# Altium PCB PhantomPowerSupply_Board.PcbDoc
Units mm, origin at the board's own origin, x right, y up, seen from the top; angles counter-clockwise.
Board outline 80 x 60 mm, 2 copper layers (Top Layer, Bottom Layer); 41 components, 26 nets, 92 pads, 0 vias.
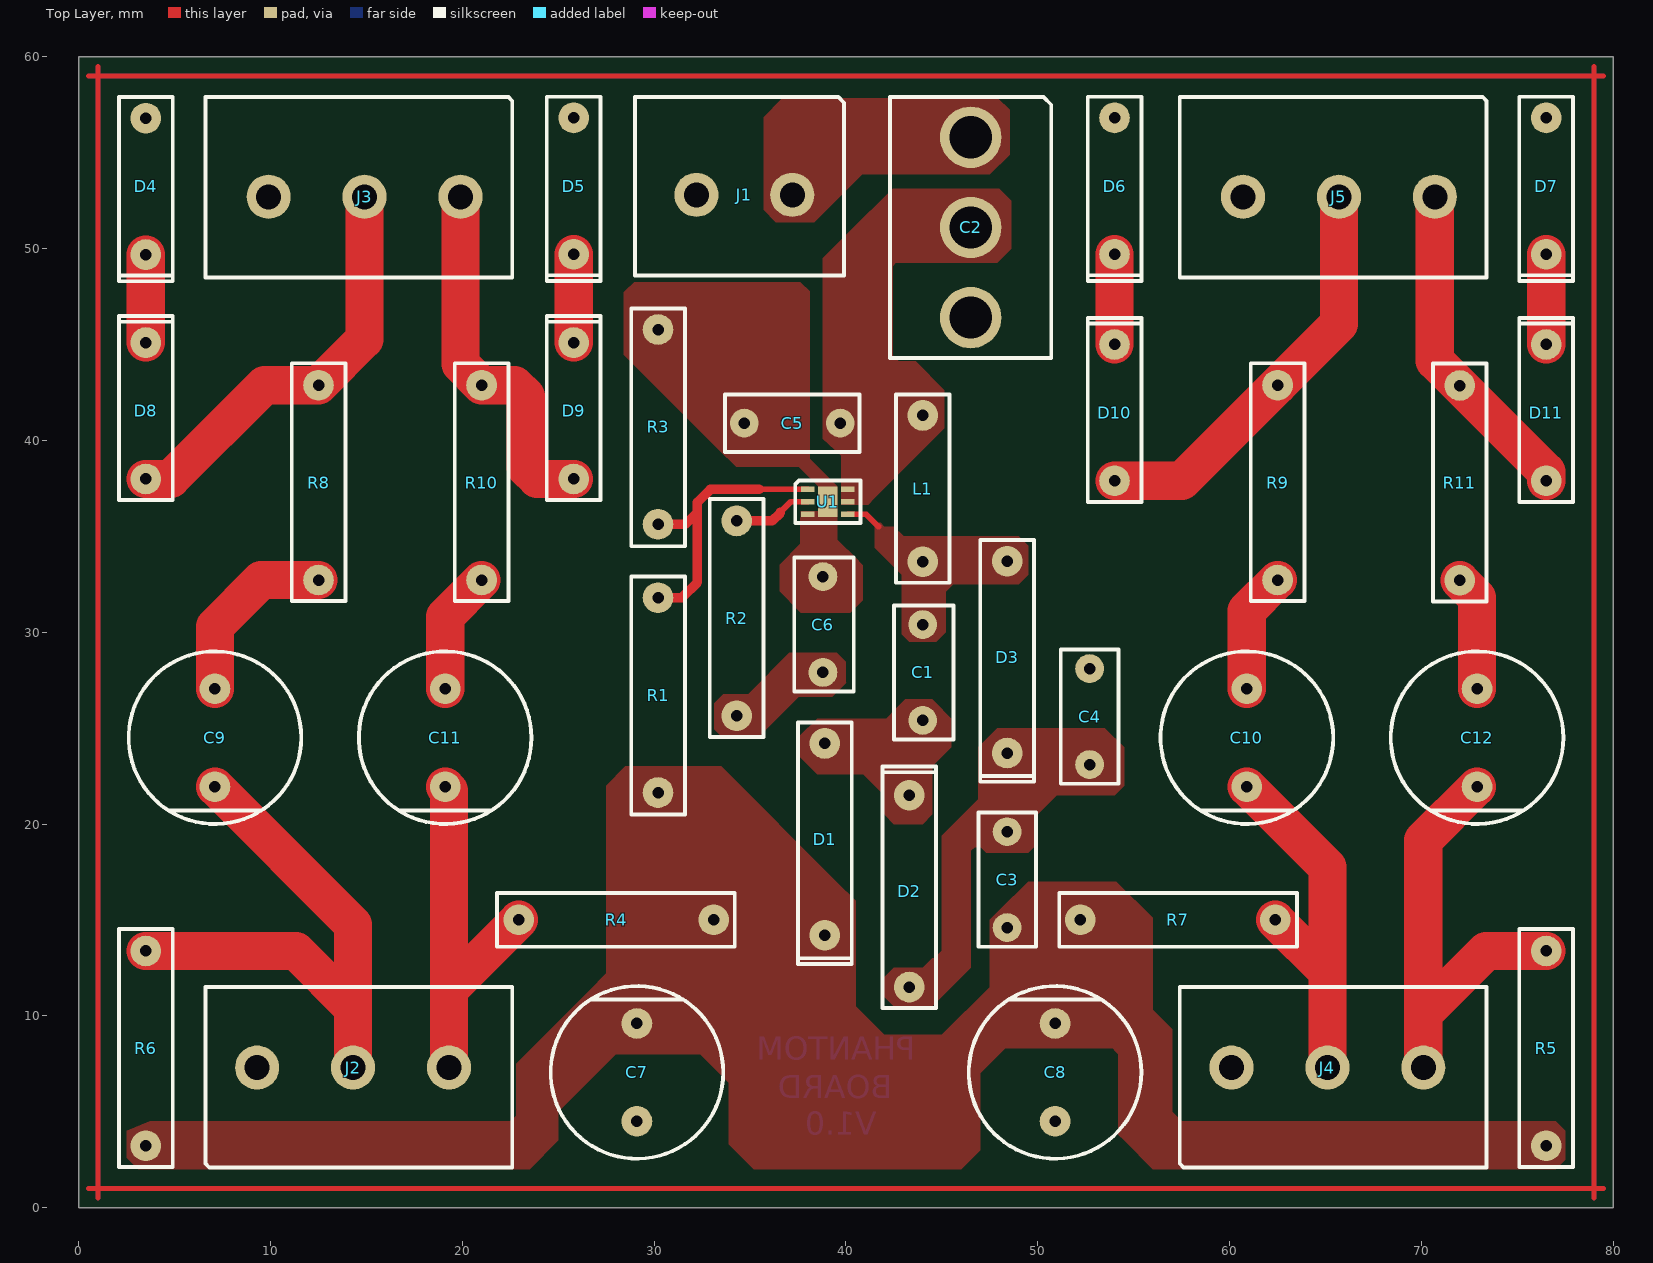
[diagram p0: Top Layer view]
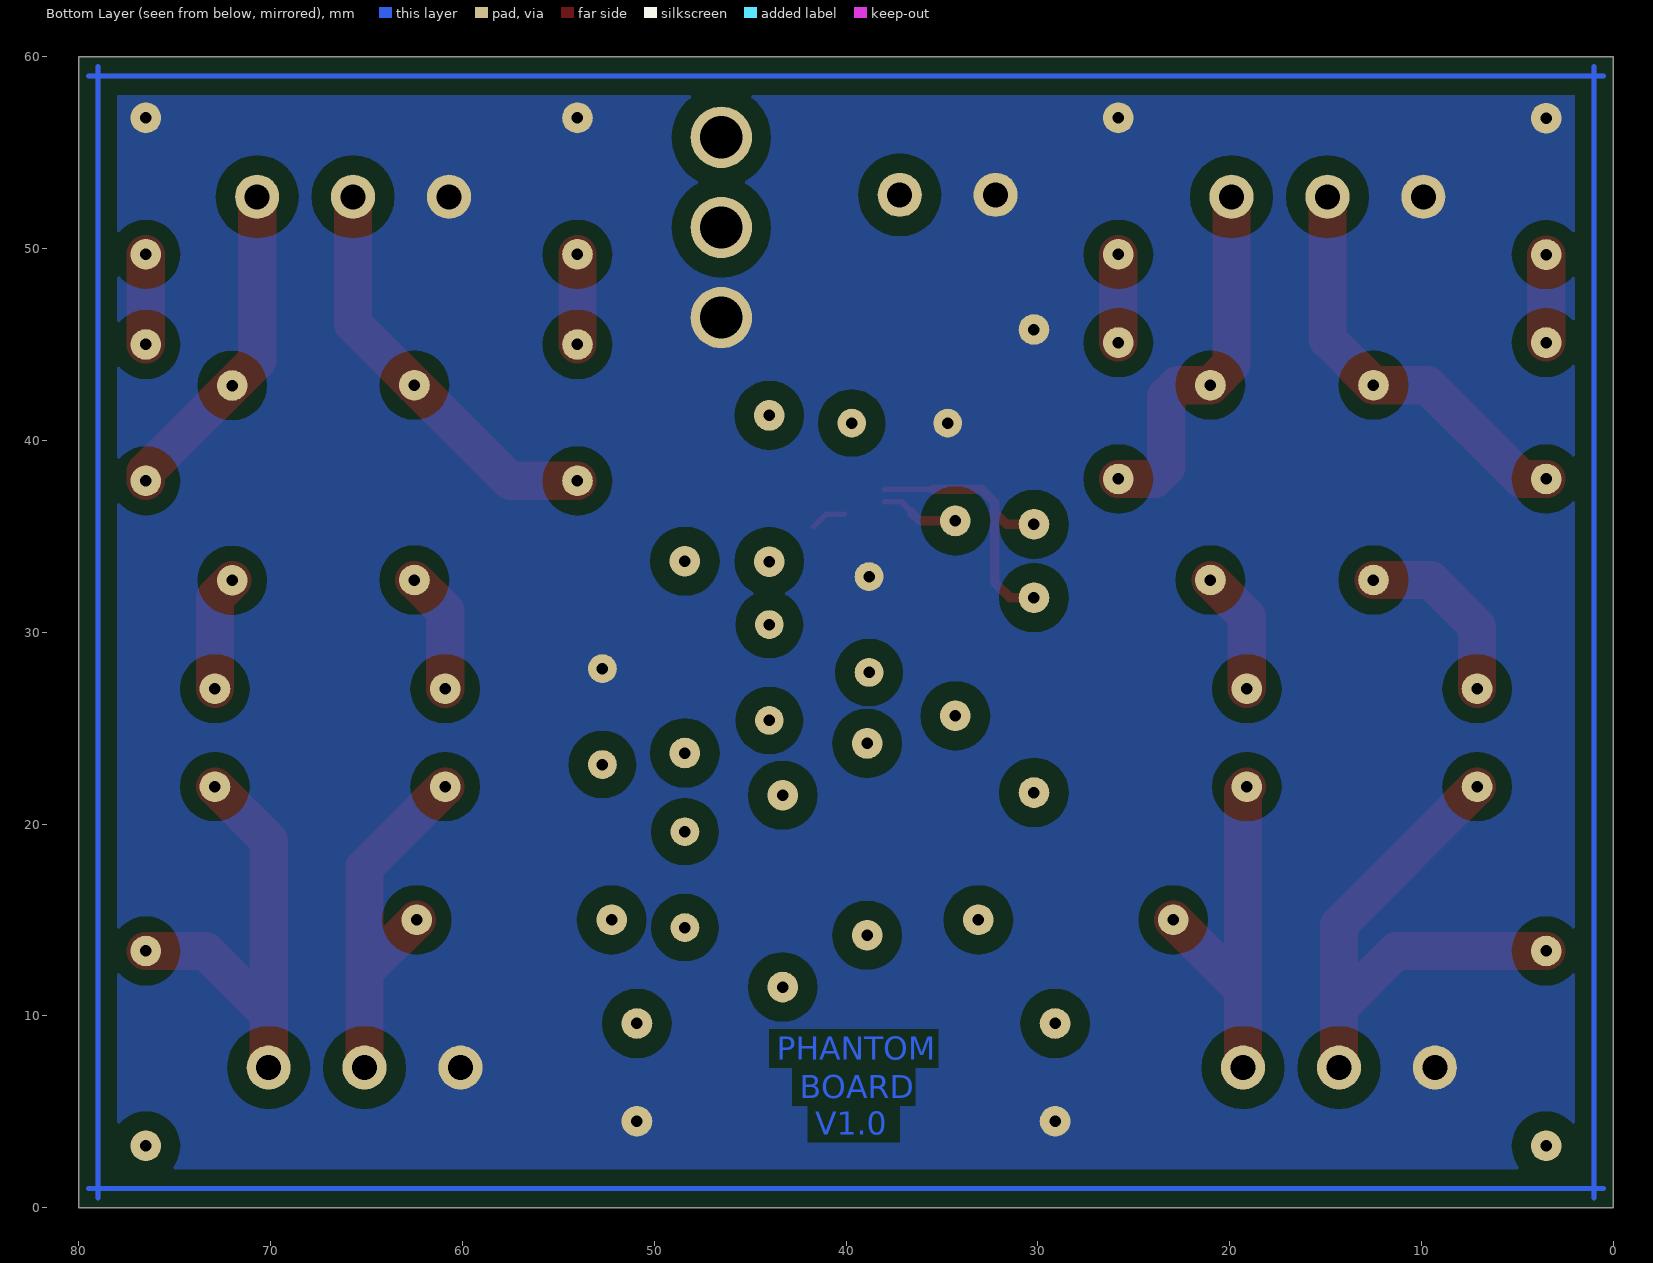
[diagram p1: Bottom Layer view, seen from below]
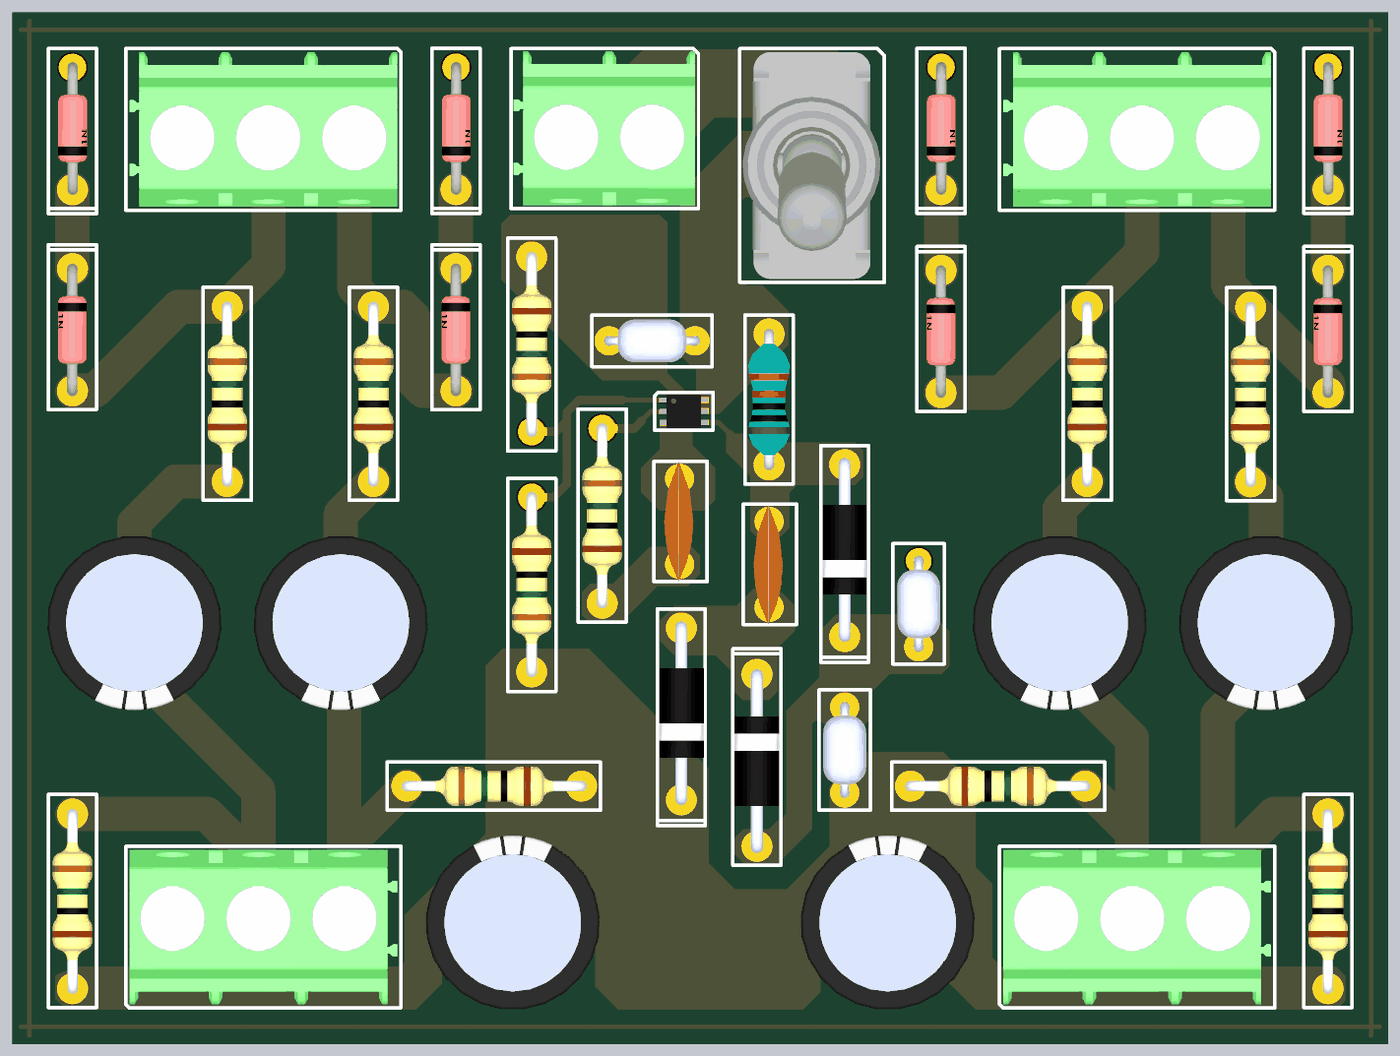
[diagram p2: 3D render of the assembled board from above, using the file's embedded part models]

## Layer stack, top to bottom
Top Solder: solder mask 0.0102, Solder Resist, Dk 3.5
Top Layer: signal copper 0.0356
Dielectric 1: dielectric 0.32, FR-4, Dk 4.8
Bottom Layer: signal copper 0.0356
Bottom Solder: solder mask 0.0102, Solder Resist, Dk 3.5

## Board outline
0,0 0,60 80,60 80,0 0,0

## Design rules (kind name [scope] priority, off if disabled: settings)
Clearance AGND_POLYGON [(OnLayer('Bottom Layer') AND InPoly) vs IsPad] p1: gap=1
Clearance [All] p2: gap=0.1
ComponentClearance [All] p1: gap=0.1 collisioncheckmode=3 verticalgap=0.1 showdistances=FALSE
Height [All] p1: minheight=0 maxheight=100 prefheight=12.7
MinimumSolderMaskSliver [All] p1: minsoldermaskwidth=0.1
PlaneClearance [All] p1: clearance=1
PlaneConnect [All] p1: planeconnectstyle=Direct reliefexpansion=0.508 reliefentries=4 reliefconductorwidth=0.254 reliefairgap=0.254
PolygonConnect [All] p1: connectstyle=Direct reliefconductorwidth=0.254 reliefentries=4 polygonreliefangle="90 Angle" airgapwidth=0.254
RoutingVias [All] p1: holewidth=0.711 width=1.27 viastyle="Through Hole" minholewidth=0.711 minwidth=1.27 maxholewidth=0.711 maxwidth=1.27
SilkToSolderMaskClearance [IsPad] p1: minsilkscreentomaskgap=0.1 clearancetoexposedcopper=TRUE
SolderMaskExpansion [All] p1: expansion=0.102
UnpouredPolygon [All] p1: allowunpoured=FALSE
Width [All] p1: maxlimit=5 minlimit=0.05 preferedwidth=0.2
23 further rules are at their usual default settings.

## Components (designator, comment, footprint, x,y, rotation, side; value= is the part's Value field where it differs from the comment)
C1 "1 uF" CRADIAL-CERAMIC-BROWN 44,27.9 r270 top
C2 "100SP1T1B1M2QEH" SPDT-M2 46.5,51.1 r270 top
C3 "4.7 uF" CRADIAL-CERAMIC 48.4,17.1 r270 top
C4 "4.7 uF" CRADIAL-CERAMIC 52.7,25.6 r270 top
C5 "4.7 uF" CRADIAL-CERAMIC 37.2,40.9 r0 top
C6 "10 nF" CRADIAL-CERAMIC-BROWN 38.8,30.4 r270 top
C7 "10uF" C-ELECTROLYTIC-RADIAL 29.1,7.05 r270 top
C8 "10uF" C-ELECTROLYTIC-RADIAL 50.9,7.05 r270 top
C9 "22uF 63 V" C-ELECTROLYTIC-RADIAL 7.1,24.5 r90 top
C10 "22uF 63 V" C-ELECTROLYTIC-RADIAL 60.9,24.5 r90 top
C11 "22uF 63 V" C-ELECTROLYTIC-RADIAL 19.1,24.5 r90 top
C12 "22uF 63 V" C-ELECTROLYTIC-RADIAL 72.9,24.5 r90 top
D1 "SB140-E3/54" D-SCHOTTKY-AXIAL 38.9,19.2 r270 top
D2 "SB140-E3/54" D-SCHOTTKY-AXIAL 43.3,16.5 r90 top
D3 "SB140-E3/54" D-SCHOTTKY-AXIAL 48.4,28.7 r270 top
D4 "ZPY10-TR" D-ZENER-AXIAL 3.5,56.8 r270 top
D5 "ZPY10-TR" D-ZENER-AXIAL 25.8,56.812 r270 top
D6 "ZPY10-TR" D-ZENER-AXIAL 54,56.812 r270 top
D7 "ZPY10-TR" D-ZENER-AXIAL 76.5,56.812 r270 top
D8 "ZPY10-TR" D-ZENER-AXIAL 3.5,37.988 r90 top
D9 "ZPY10-TR" D-ZENER-AXIAL 25.8,37.988 r90 top
D10 "ZPY10-TR" D-ZENER-AXIAL 54,37.888 r90 top
D11 "ZPY10-TR" D-ZENER-AXIAL 76.5,37.888 r90 top
J1 "BC-500X10-2BK" SCREW-CON-2POS 34.7,52.8 r180 top
J2 "BC-500X10-3GN" SCREW-CON-3POS 14.3,7.3 r0 top
J3 "BC-500X10-3GN" SCREW-CON-3POS 14.9,52.7 r180 top
J4 "BC-500X10-3GN" SCREW-CON-3POS 65.1,7.3 r0 top
J5 "BC-500X10-3GN" SCREW-CON-3POS 65.7,52.7 r180 top
L1 "22uH" L-AXIAL 44,41.3 r270 top
R1 "383k" R-AXIAL 30.2,26.72 r270 top
R2 "10k" R-AXIAL 34.3,30.72 r90 top
R3 "10k" R-AXIAL 30.2,40.7 r270 top
R4 "6.81k 0.1%" R-AXIAL 28.02,15 r180 top
R5 "6.81k 0.1%" R-AXIAL 76.5,8.3 r90 top
R6 "6.81k 0.1%" R-AXIAL 3.5,8.3 r90 top
R7 "6.81k 0.1%" R-AXIAL 57.3,15 r0 top
R8 "10" R-AXIAL 12.5,37.8 r90 top
R9 "10" R-AXIAL 62.5,37.8 r90 top
R10 "10" R-AXIAL 21,37.8 r90 top
R11 "10" R-AXIAL 72,37.78 r90 top
U1 "TPS61170DRVR" S-PWSON-N6 39.05,36.8 r0 top

## Footprints (in the part's own frame and the unit in brackets; to place one, negate y for a bottom-side part, rotate by r counter-clockwise, add the part's x,y. Pads: shape width x height; smd on the part's side, far side on the other; paste and mask are expansions set on the pad)
C-ELECTROLYTIC-RADIAL [mm]
  round 1.6 hole 0.6: 1(-2.55,0) 2(2.55,0)
  silkscreen extent -4.5,-4.5 4.5,4.5, body extent -5.08,-5.06 5.04,5.06, height 12.8
CRADIAL-CERAMIC [mm]
  round 1.5 hole 0.6: 1(-2.5,0) 2(2.5,0)
  silkscreen extent -3.5,-1.5 3.5,1.5, body extent -2.75,-1.25 2.75,1.25, height 6.54
CRADIAL-CERAMIC-BROWN [mm]
  round 1.5 hole 0.6: 1(-2.5,0) 2(2.5,0)
  silkscreen extent -3.5,-1.5 3.5,1.6, body extent -3.5,-0.9 3.5,0.8, height 7.25
D-SCHOTTKY-AXIAL [mm]
  round 1.6 hole 0.6: 1(-5,0) 2(5,0)
  silkscreen extent -6.1,-1.4 6.5,1.4, body extent -5.4,-1.3 5.3,1.3, height 3.3
D-ZENER-AXIAL [mm]
  round 1.6 hole 0.6: 1(0,0) 2(7.112,0)
  silkscreen extent -1.1,-1.4 8.5,1.4, body extent -0.31,-0.83 7.41,0.85, height 2.34
L-AXIAL [mm]
  round 1.6 hole 0.6: 1(0,0) 2(7.62,0)
  silkscreen extent -1.1,-1.4 8.72,1.4, body extent -0.3,-1.21 7.92,1.2, height 2.7
R-AXIAL [mm]
  round 1.6 hole 0.6: 1(-5.08,0) 2(5.08,0)
  silkscreen extent -6.18,-1.4 6.22,1.4, body extent -5.38,-1.16 5.38,1.16, height 2.93
S-PWSON-N6 [mm]
  rect 0.7x0.3 smd mask+0.04: 1(-1.05,0.65) 2(-1.05,0) 3(-1.05,-0.65) 4(1.05,-0.65) 5(1.05,0) 6(1.05,0.65)
  rect 1x1.6 smd mask+0.04: 7(0,0)
  silkscreen extent -1.7,-1.1 1.7,1.1, body extent -1,-1 1,1, height 0.75
SCREW-CON-2POS [mm]
  round 2.3 hole 1.3: 1(-2.5,0) 2(2.5,0)
  silkscreen extent -5.2,-5.1 5.7,4.2, body extent -5.01,-4.95 5.56,4.05, height 11.4
SCREW-CON-3POS [mm]
  round 2.3 hole 1.3: 1(-5,0) 2(0,0) 3(5,0)
  silkscreen extent -7.7,-5.2 8.3,4.2, body extent -7.48,-5 8.09,4, height 11.4
SPDT-M2 [mm]
  round 3.2 hole 2.2: 1(-4.7,0) 2(0,0) 3(4.7,0)
  silkscreen extent -6.8,-4.2 6.8,4.2, body extent -6.6,-4.02 6.6,3.97, height 33.36

## Part data
C1: library part K105K20X7RF5TH5, "Multilayer Ceramic Capacitors MLCC - Leaded 1uF 50volts 10% X7R 5mm LS"
C2: "Toggle Switches SPDT ON-ON PC MNT"
C3 C4 C5: library part FK11X7R1H475K, "Multilayer Ceramic Capacitors MLCC - Leaded 4.7uF 50volts X7R +/-10%"
C6: library part K103K15X7RF5UH5, "Multilayer Ceramic Capacitors MLCC - Leaded .01uF 50volts 10% 5.0mm X7R"
C7 C8: library part REA100M1HBK-0511P, "Aluminium Electrolytic Capacitors - Leaded 50V 10uF 20% 5x11mm"
C9 C10 C11 C12: library part REA220M1JBK-0611P, "Aluminium Electrolytic Capacitors - Leaded 63V 22uF 20% 6.3x11 mm"
D1 D2 D3: "Schottky Diodes & Rectifiers 40 Volt 1.0 Amp 50 Amp IFSM"
D4 D5 D6 D7 D8 D9 D10 D11: "Zener Diodes 10 Volt 1.3 Watt 5%"
J1: library part 5441537, "Fixed Terminal Blocks BC-500X10- 2 BK"
J2 J3 J4 J5: library part 5442183, "Fixed Terminal Blocks BC-500X10- 3 GN 5.00 MM PITCH"
L1: library part 78F220J-RC, "Fixed Inductors 22uH 5%"
R1: library part MF1/4DCT26A3833F, "Metal Film Resistors - Through Hole 1/4 WATT 383K OHM 1%"
R2 R3: library part MF1/4DCT52A1002F, "Metal Film Resistors - Through Hole 1/4 WATT 10K OHM 1%"
R4 R5 R6 R7: library part RN55E6811BRE6, "Metal Film Resistors - Through Hole 1/10watt 6.81Kohms .1% 25ppm"
R8 R9 R10 R11: library part FRM-50JT-52-10R, "Metal Film Resistors - Through Hole 10 OHM 1/2W 5%"
U1: "Voltage Regulators - Switching Regulators 1.2A Sw Hi Vltg Boost Conv"

## Nets (pads, with @x,y where several pads share a name; then routed paths per layer and width w, separated by ;. In a path a pad name is that pad's centre, name@x,y a point inside that pad or via, vN(x,y) a via of type N, cw(c..) or ccw(c..) an arc to the next point about the centre after c; other vN are vias at no path point)
+48V: C3.2 C7.1 C8.1 D1.2 R1.2 R4.1 R5.1 R6.1 R7.1
+VIN: C2.2 C5.2 L1.1 U1.5 U1.6
+VINPUT: C2.1 J1.1
AGND: C2.3 C4.1 C5.1 C6.1 C7.2 C8.2 D4.1 D5.1 D6.1 D7.1 J1.2 J2.1 J3.3 J4.1 J5.3 R3.1 U1.3 U1.7
COMP: R2.2 U1.2 | length 4.1
  Top Layer w0.3: 36.575,36.25 37.125,36.8 U1.2
  Top Layer w0.5: R2.2 36.15,35.8 36.575,36.225 36.575,36.25
FB: R1.1 R3.2 U1.1 | length 14.9
  Top Layer w0.3: 35.462,37.45 U1.1
  Top Layer w0.5: R1.1 31.45,31.8 32.25,32.6 32.25,36.25 ; R3.2 31.62,35.62 32.25,36.25 ; 35.462,37.45 32.925,37.45 32.25,36.775 32.25,36.25
MIC1IN_+: C9.1 J2.2 R6.2 | length 29.7
  Top Layer w2: R6.2 11.32,13.38 14.3,10.4 ; C9.1 14.3,14.75 14.3,10.4 ; J2.2 14.3,10.4
MIC1IN_-: C11.1 J2.3 R4.2 | length 19.9
  Top Layer w2: C11.1 19.3,21.75 19.3,11.4 ; J2.3 19.3,11.4 ; R4.2 19.34,11.4 19.3,11.4
MIC1OUT_+: D8.1 J3.2 R8.2 | length 21.8
  Top Layer w2: D8.1 4.788,37.988 9.68,42.88 R8.2 14.9,45.28 J3.2
MIC1OUT_-: D9.1 J3.1 R10.2 | length 19.3
  Top Layer w2: J3.1 19.9,43.98 R10.2 22.72,42.88 23.3,42.3 23.3,38.6 23.912,37.988 D9.1
MIC2IN_+: C10.1 J4.2 R7.2 | length 20.2
  Top Layer w2: C10.1 65.1,17.75 65.1,12.28 ; R7.2 65.1,12.28 ; J4.2 65.1,12.28
MIC2IN_-: C12.1 J4.3 R5.2 | length 23.6
  Top Layer w2: J4.3 70.1,10.1 ; C12.1 70.1,19.15 70.1,10.1 ; R5.2 73.38,13.38 70.1,10.1
MIC2OUT_+: D10.1 J5.2 R9.2 | length 22
  Top Layer w1: D10.1 D10.1@54.212,38.1
  Top Layer w2: D10.1 57.508,37.888 R9.2 65.7,46.08 J5.2
MIC2OUT_-: D11.1 J5.1 R11.2 | length 17.2
  Top Layer w2: J5.1 70.7,44.16 R11.2 76.5,38.36 D11.1
NetC1_2: C1.2 D1.1 D2.2
NetC3_1: C3.1 C4.2 D2.1 D3.2
NetC6_2: C6.2 R2.1
NetC9_2: C9.2 R8.1 | length 9.7
  Top Layer w2: C9.2 7.1,30.3 9.52,32.72 R8.1
NetC10_2: C10.2 R9.1 | length 6.3
  Top Layer w2: C10.2 60.9,31.12 R9.1
NetC11_2: C11.2 R10.1 | length 6.5
  Top Layer w2: C11.2 19.1,30.82 R10.1
NetC12_2: C12.2 R11.1 | length 6
  Top Layer w2: R11.1 72.9,31.8 C12.2
NetD4_2: D4.2 D8.2 | length 4.6
  Top Layer w2: D8.2 D4.2
NetD5_2: D5.2 D9.2 | length 4.6
  Top Layer w2: D9.2 D5.2
NetD6_2: D6.2 D10.2 | length 4.7
  Top Layer w2: D10.2 D6.2
NetD7_2: D7.2 D11.2 | length 4.7
  Top Layer w2: D11.2 D7.2
SW: C1.1 D3.1 L1.2 U1.4 | length 1.9
  Top Layer w0.3: U1.4 41.05,36.15 41.7,35.5
copper on no net: | length 552.1
  Top Layer w0.254: 0.5,1 1.5,1 78.5,1 79.5,1 ; 0.5,59 1.5,59 78.5,59 79.5,59 ; 1,0.5 1,1.5 1,58.5 1,59.5 ; 79,0.5 79,1.5 ; 79,1.4 79,58.5 79,59.5
  Bottom Layer w0.254: 0.5,1 1.5,1 78.5,1 79.5,1 ; 0.5,59 1.5,59 78.5,59 79.5,59 ; 1,0.5 1,1.5 1,58.5 1,59.5 ; 79,0.5 79,1.5 79,58.5 79,59.5

## Polygon pours and split planes (outlines as drawn)
+48V on Top Layer "+VIN_TOPLAYER_PL" (solid, pour order 26): 27.5,16.2 27.5,22 28.5,23 32,23 33.5,23 39.5,17 39.5,16.5 35.9,12.9 35.5,12.5 30.1,12.5 30.1,13.6
NetC1_2 on Top Layer "+VIN_TOPLAYER_PL" (solid, pour order 25): 45,26 44.5,26.5 43.1,26.5 42.6,26 42.1,25.5 42,25.5 38.5,25.5 37.6,24.6 37.6,23.5 38.5,22.6 40.9,22.6 42,21.5 42,20.5 42.5,20 44,20 44.5,20.5 44.5,22.5 44.5,23 45.5,24 45.5,25.5 45,26 44.8,26.2
+48V on Top Layer "+VIN_TOPLAYER_PL" (solid, pour order 24): 2.5,4 2.5,2.6 3.1,2 23.5,2 25,3.5 25,4.9 25,5 28,8 30.1,8 30.6,8.5 30.6,10.2 30.6,10.3 29.9,11 28.567,11 27.9,12.6 26.3,11 22.8,7.5 22.8,5 22.8,4.8 22.5,4.5 21.5,4.5 3.707,4.5
+48V on Top Layer "+VIN_TOPLAYER_PL" (solid, pour order 22): 77.5,2.5 77,2 57,2 56,2 54.5,3.5 54.2,3.8 54.2,6.9 54.2,8 53.709,8.491 54.2,8.983 54.424,9.524 55.6,10.7 56.3,10 56.8,9.5 57,9.3 57,5 57.5,4.5 59.5,4.5 77,4.5 77.5,4
+48V on Top Layer "+VIN_TOPLAYER_PL" (solid, pour order 19): 48,15.5 47.5,15 47.5,11.5 45,9 42,9 40.5,10.5 40.5,16 39.5,17 32.5,17 28.3,17 27.5,16.2 27.5,9 28.5,8 32.4,8 33.9,6.5 33.9,3.3 35.2,2 45.8,2 46,2 47,3 47,7 48.3,8.3 54.4,8.3 56,9.9 56,15.1 54.1,17 49.5,17
NetC3_1 on Top Layer "+VIN_TOPLAYER_PL" (solid, pour order 18): 42.5,10.5 42,11 42,12 42.5,12.5 44,12.5 44.5,13 44.6,13 45,13.4 45,13.5 45,19.4 46.9,21.3 47,21.2 47,18.8 46.7,18.8 46.5,18.6 46.5,13.5 46.5,12.5 45.5,11.5 44.5,10.5 42.5,10.5
NetC3_1 on Top Layer "+VIN_TOPLAYER_PL" (solid, pour order 16): 46.9,24 47.9,25 48,25 53.5,25 54.5,24 54.5,22 54,21.5 51,21.5 50,20.5 50,19 49.5,18.5 47.5,18.5 47.3,18.5 46.8,19 46.9,19.1 46.9,24.1 47,24.1 47.9,25
+VIN on Top Layer "+VIN_TOPLAYER_PL" (solid, pour order 14): 39.75,36.65 40.45,36.65 41.15,36.65 41.5,37 45.125,40.625 45.125,42.625 43.625,44.125 42.75,44.125 42.425,44.45 42.425,49.075 42.6,49.25 47.875,49.25 48.625,50 48.625,52.5 48,53.125 43.075,53.125 42.425,53.125 40.175,50.875 38.8,49.5 38.8,45.8 38.8,40.079 39.75,39.2 39.75,37.9
AGND on Top Layer "+VIN_TOPLAYER_PL" (solid, pour order 15): 37.65,36 39.55,36 39.55,37.6 38.1,39.05 38.1,40.325 38.1,47.775 37.625,48.25 29,48.25 28.95,48.25 28.5,47.8 28.425,47.725 28.425,44.675 28.425,44.475 33.35,39.55 34.288,38.612 34.75,38.612 36.238,38.612 37.537,38.612 38.55,37.6 38.55,36.3 37.65,36.3
AGND on Top Layer "+VIN_TOPLAYER_PL" (solid, pour order 17): 37.65,36.3 37.65,36 37.625,35.975 37.625,34.6 36.55,33.525 36.55,32.3 36.55,32.125 37.575,31.1 37.65,31.025 40.075,31.025 40.225,31.025 40.875,31.675 40.875,33.5 40.475,33.9 39.625,34.75 39.55,34.825 39.55,36.3 37.625,36.3
+VINPUT on Top Layer "+VIN_TOPLAYER_PL" (solid, pour order 20): 36.6,51.375 38.35,51.375 40.85,53.875 45.975,53.875 47.5,53.875 48.525,54.9 48.525,57.225 47.9,57.85 36.625,57.85 36.625,57.775 35.725,56.875 35.7,56.85 35.7,52.125 35.7,52.025 36.35,51.375 36.675,51.375
NetC6_2 on Top Layer "+VIN_TOPLAYER_PL" (solid, pour order 21): 33.375,24.65 35.375,24.65 35.55,24.65 37.5,26.6 37.525,26.625 39.25,26.625 39.275,26.625 40.025,27.375 40,27.4 40,28.45 39.525,28.925 37.1,28.925 37.05,28.925 35,26.875 34.9,26.775 33.6,26.775 33.175,26.35 33.125,26.3 33.125,25.075 33.125,24.95 33.425,24.65 33.8,24.65
SW on Top Layer "+VIN_TOPLAYER_PL" (solid, pour order 23): 41.5,35.6 41.5,35 41.5,34.4 42.9,33 42.9,30 42.9,29.9 43.3,29.5 44.7,29.5 45.2,30 45.2,32.1 45.6,32.5 49,32.5 49.5,33 49.5,34.5 49,35 43,35 42.5,35.5 42,35.5 41.8,35.7 41.5,35.7
AGND on Bottom Layer "AGND_BL" (solid, pour order 29): 2,58 2,2 78,2 78,58 2,58

## Other copper
Bottom Layer:
  text "PHANTOM" at 43.6,7.7 h1.2
  text "BOARD" at 42.4,5.7 h1.2
  text "V1.0" at 41.6,3.8 h1.2